# EAGLE board schema_carte_mere (EAGLE 6.4)
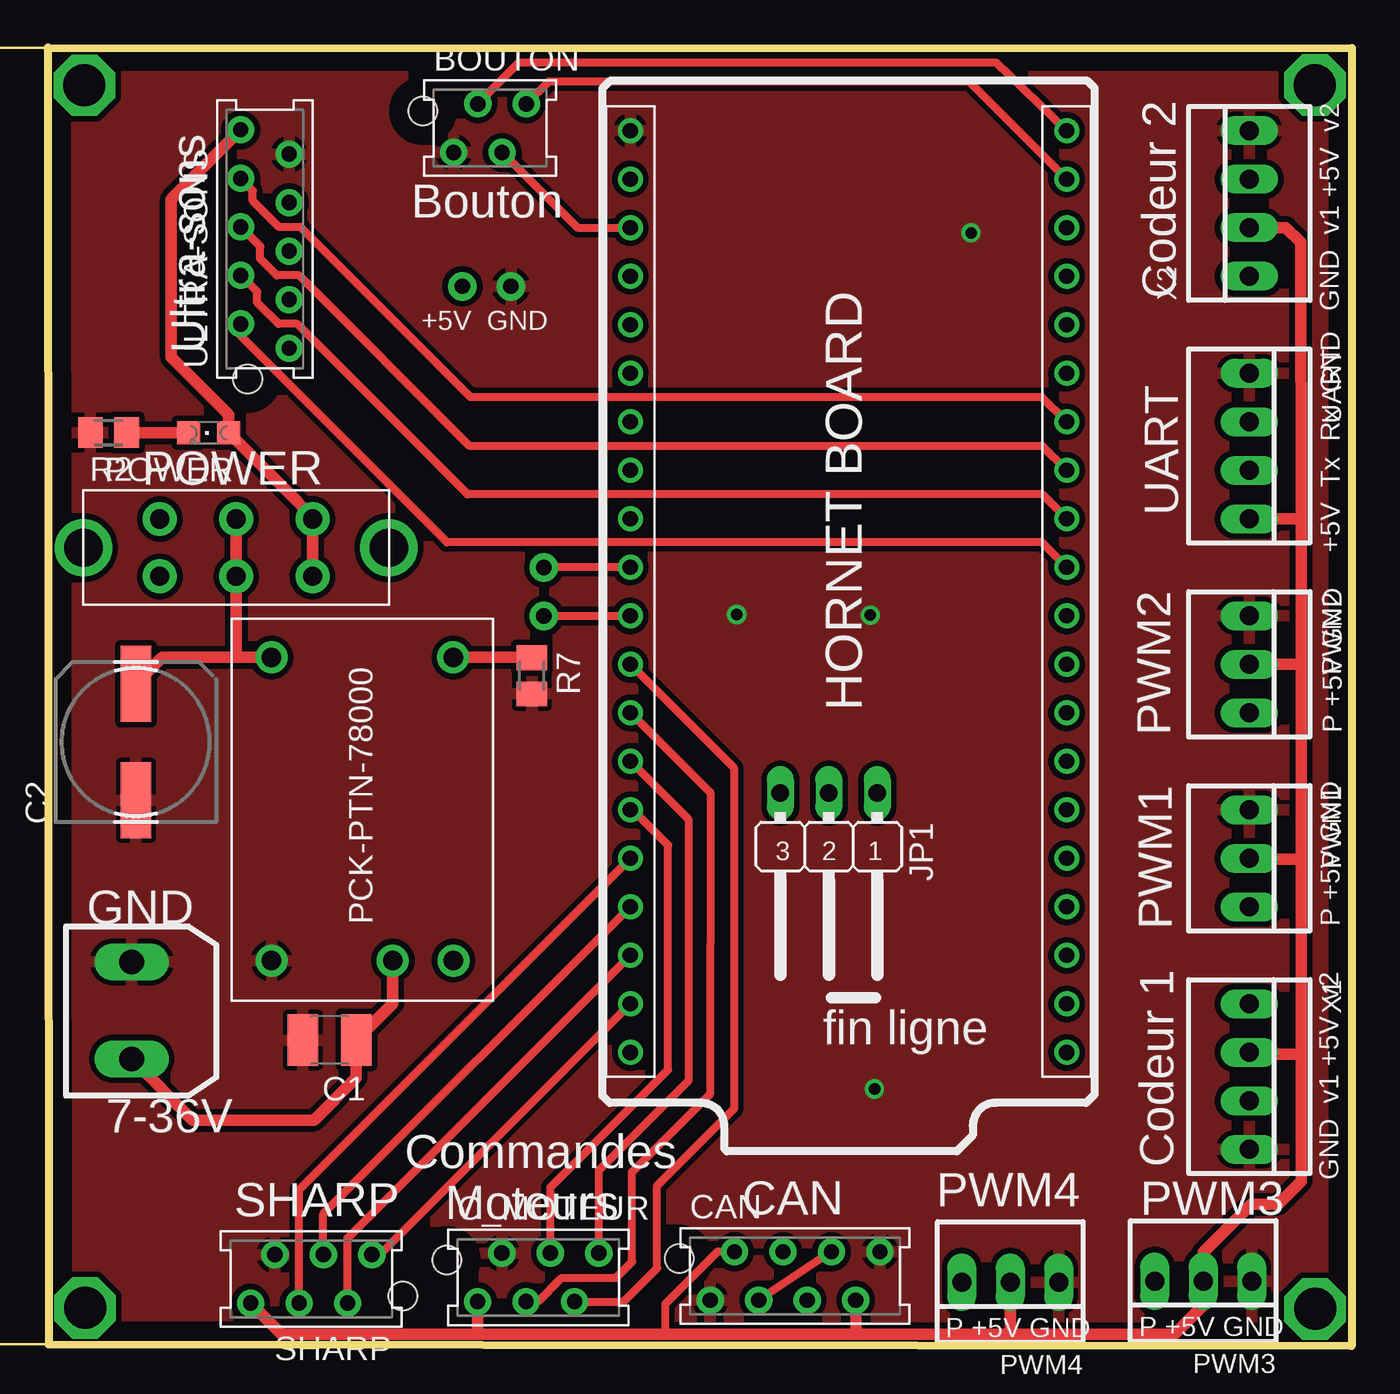
[diagram p0: board, top side]
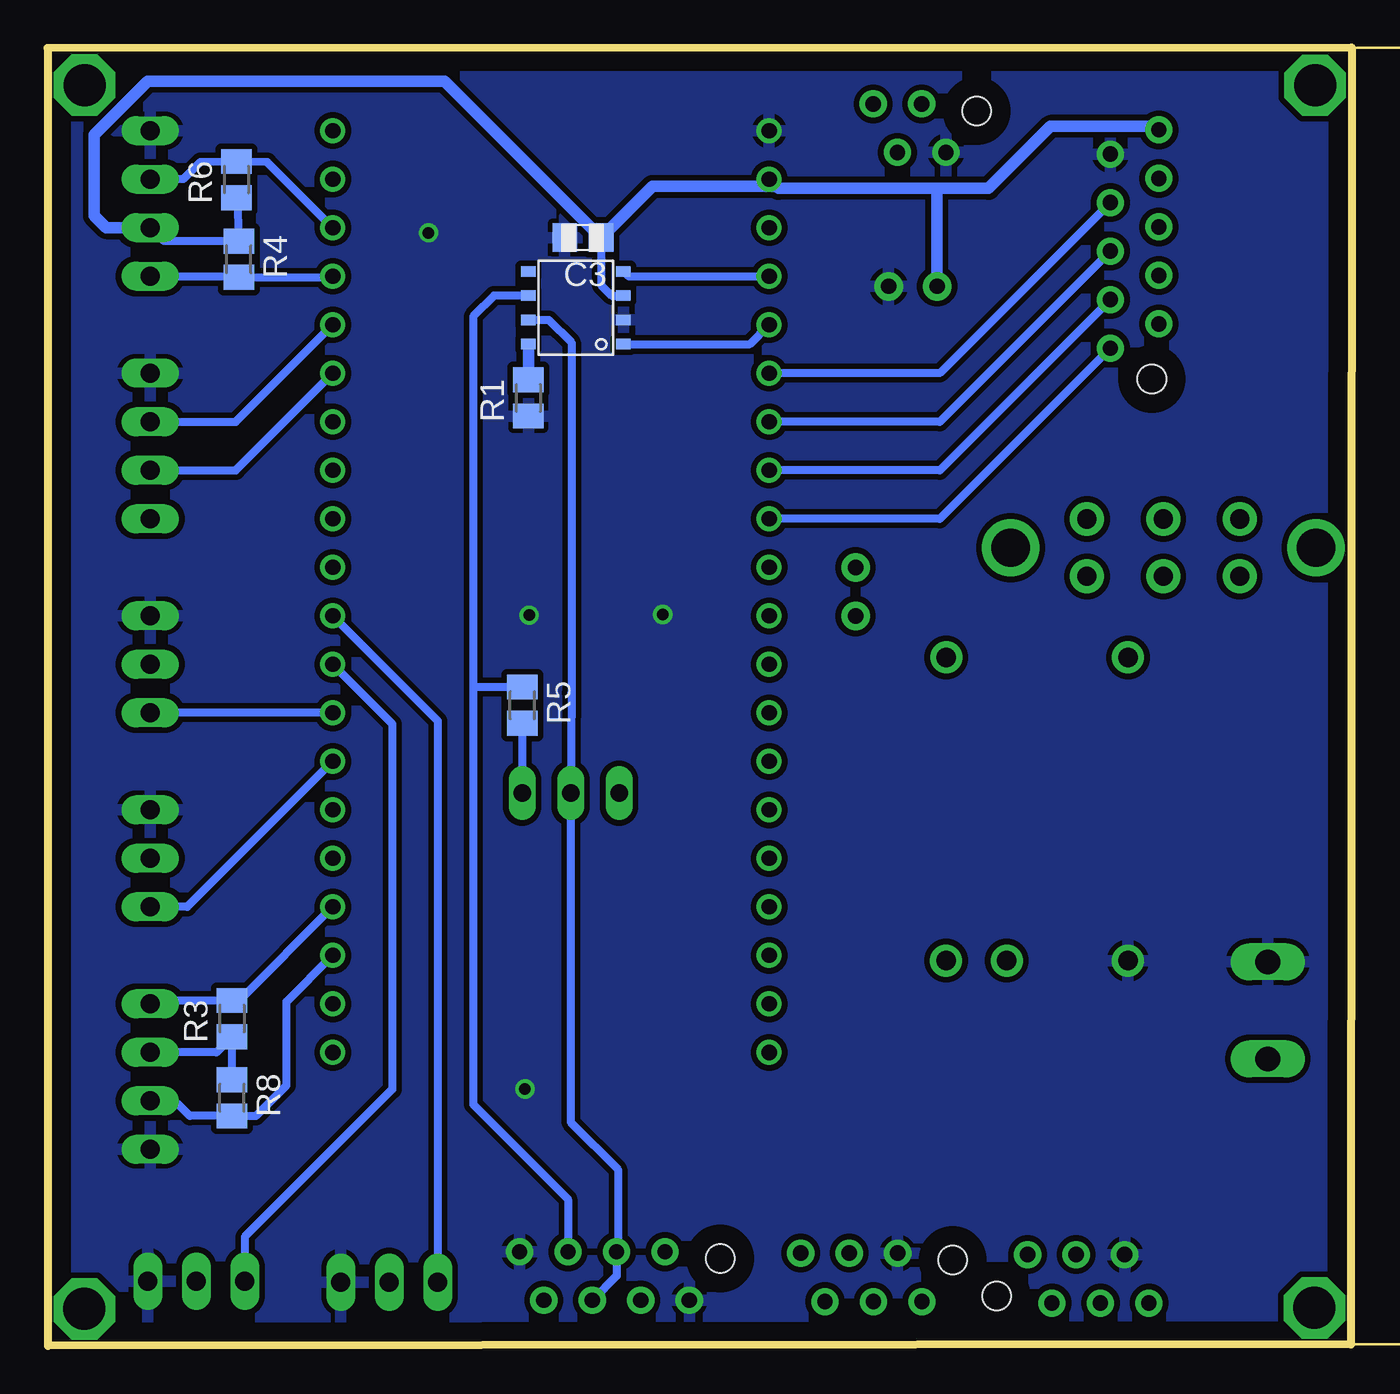
[diagram p1: board, bottom side, seen from below]

Size 68.31 x 67.97 mm. Coordinates in mm from the lower left corner, seen from the top.
Outline: 0.01,67.97 68.31,67.95 68.3,0
Outline: 0,67.97 0.04,0.07 68.3,0
Outline: 68.3,0 68.3,0
Copper layers (1*16): Top 0.035mm / dielectric 1.5mm / Bottom 0.035mm
Design rules "default": minimum track width 10mil, minimum drill 24mil, track to track 8mil, track to pad 8mil, pad to pad 8mil, via to via 8mil, smd to smd 8mil, copper to edge 40mil, drill to drill 8mil, minimum pad ring 10mil, minimum via ring 8mil, stop-mask expansion 4mil, vias tented up to drill 0mil, thermal gap 10mil
Milling: area -15,66.5 to -14.4,68; area -15,0.1 to -14.4,1.6; area -14.3,31.2 to -12.5,36.8; 6 lines

## Footprints (pad centres in the part's own frame; a part is rotated, then mirrored left to right if it is on the bottom)
PM5.08_2 = drill 1.3 long: P$1 0,0; P$2 -5.08,0
AMP-215079-4 = drill 0.8 pad 1.422: 1 0,0; 2 1.27,2.54; 3 2.54,0; 4 3.81,2.54 | hole 1.5: -1.62,2.175
C1210 = smd 1.6 x 2.7: 1 -1.4,0; 2 1.4,0
153CLV-0807 = smd 4 x 1.6: + 3.05,0; - -3.05,0
C0805 = smd 1.3 x 1.5: 1 -0.95,0; 2 0.95,0
AMP-215079-6 = drill 0.8 pad 1.422: 1 0,0; 2 1.27,2.54; 3 2.54,0; 4 3.81,2.54; 5 5.08,0; 6 6.35,2.54 | hole 1.5: -1.62,2.175
AMP-215079-8 = drill 0.8 pad 1.422: 1 0,-1.27; 2 1.27,1.27; 3 2.54,-1.27; 4 3.81,1.27; 5 5.08,-1.27; 6 6.35,1.27; 7 7.62,-1.27; 8 8.89,1.27 | hole 1.5: -1.62,0.905
JP2W = drill 0.914 long: 1 -2.54,-1.27; 2 0,-1.27; 3 2.54,-1.27
2_PIN = drill 0.8 pad 1.5: P$1 0,0; P$2 2.54,0
CHIPLED_0805 = smd 1.2 x 1.2: A 0,-1.05; C 0,1.05
22-23-2031 = drill 1 long: 1 -2.54,0; 2 0,0; 3 2.54,0
M0805 = smd 1.3 x 1.6: 1 -0.95,0; 2 0.95,0
HORNET_EXT_20 = drill 0.8: P$1 0,0; P$2 0,-2.54; P$3 0,-5.08; P$4 0,-7.62; P$5 0,-10.16; P$6 0,-12.7; P$7 0,-15.24; P$8 0,-17.78; P$9 0,-20.32; P$10 0,-22.86; P$11 0,-25.4; P$12 0,-27.94; P$13 0,-30.48; P$14 0,-33.02; P$15 0,-35.56; P$16 0,-38.1; P$17 0,-40.64; P$18 0,-43.18; P$19 0,-45.72; P$20 0,-48.26; P$21 22.86,-48.26; P$22 22.86,-45.72; P$23 22.86,-43.18; P$24 22.86,-40.64; P$25 22.86,-38.1; P$26 22.86,-35.56; P$27 22.86,-33.02; P$28 22.86,-30.48; P$29 22.86,-27.94; P$30 22.86,-25.4; P$31 22.86,-22.86; P$32 22.86,-20.32; P$33 22.86,-17.78; P$34 22.86,-15.24; P$35 22.86,-12.7; P$36 22.86,-10.16; P$37 22.86,-7.62; P$38 22.86,-5.08; P$39 22.86,-2.54; P$40 22.86,0
SOIC_8 = smd 0.559 x 0.762: P1 0,-4.966; P2 1.27,-4.966; P3 2.54,-4.966; P4 3.81,-4.966; P5 3.81,0; P6 2.54,0; P7 1.27,0; P8 0,0
SWITCH = drill 1 pad 1.778: 1 0,8; 2 0,4; 3 0,0; 4 3,8; 5 3,4; 6 3,0 | drill 2: GND 1.5,-4; GND2 1.5,12
PCK-PTN-78000WAH = drill 1.02 pad 1.676: 1 0,0; 2 0,-6.35; 3 0,-9.53; 4 15.88,-9.52; 5 15.88,0
22-23-2041 = drill 1 long: 1 -3.81,0; 2 -1.27,0; 3 1.27,0; 4 3.81,0
AMP-215079-10 = drill 0.8 pad 1.422: 1 0,-1.27; 2 1.27,1.27; 3 2.54,-1.27; 4 3.81,1.27; 5 5.08,-1.27; 6 6.35,1.27; 7 7.62,-1.27; 8 8.89,1.27; 9 10.16,-1.27; 10 11.43,1.27 | hole 1.5: -1.62,0.905

## Placement (x,y rotation side)
ALIM  PM5.08_2  [PM5.08_2]  4.4,15.02 270 top
BOUTON  MMATCH-4-  [AMP-215079-4]  21.26,62.49 0 top
C1  2.2u  [C1210]  14.76,16.01 180 top
C2  100uF  [153CLV-0807]  4.62,31.61 90 top
C3  100nF  [C0805]  40.27,58.02 180 bottom
C_MOTEUR  MMATCH-6-  [AMP-215079-6]  22.52,2.31 0 top
CAN  [AMP-215079-8]  34.7,3.66 0 top
JP1  [JP2W]  40.92,27.67 180 top
PIN_ALIM  2_PIN  [2_PIN]  21.72,55.48 0 top
POWER  [CHIPLED_0805]  8.44,47.8 90 top
PWM1  22-23-2031  [22-23-2031]  62.94,25.52 270 top
PWM2  22-23-2031  [22-23-2031]  62.94,35.69 270 top
PWM3  22-23-2031  [22-23-2031]  60.53,3.38 180 top
PWM4  22-23-2031  [22-23-2031]  50.42,3.33 180 top
R1  21k  [M0805]  43.13,49.63 90 bottom
R2  1k  [M0805]  3.19,47.82 180 top
R3  2.7k  [M0805]  58.65,17.13 90 bottom
R4  2.7k  [M0805]  58.3,56.89 270 bottom
R5  120  [M0805]  43.45,33.54 270 bottom
R6  2.7k  [M0805]  58.42,61.06 90 bottom
R7  21k  [M0805]  25.36,35.08 270 top
R8  2.7k  [M0805]  58.66,12.99 270 bottom
SHARP  MMATCH-6-  [AMP-215079-6]  16.98,4.77 180 top
U$1  HORNET_BOARD  [HORNET_EXT_20]  30.52,63.62 0 top
U$2  MCP2551  [SOIC_8]  43.12,52.45 90 bottom
U$3  2_PIN  [2_PIN]  25.99,38.21 90 top
U$6  SWITCH  [SWITCH]  13.87,40.29 90 top
U$18  PTN-78000WAH  [PCK-PTN-78000WAH]  11.72,20.16 90 top
UART  22-23-2041  [22-23-2041]  62.94,47.12 270 top
ULTRA-SONS  [AMP-215079-10]  11.38,52.24 90 top
X1  22-23-2041  [22-23-2041]  62.94,14.09 270 top
X2  22-23-2041  [22-23-2041]  62.94,59.81 90 top

## Library data of the parts
ALIM = con_Weidmueller
BOUTON C_MOTEUR CAN SHARP ULTRA-SONS = jt-con-micromatch
C1-C3 R1-R8 = rcl
JP1 = jumper
PIN_ALIM U$1 U$3 = con-HORNET
POWER = led
PWM1-PWM4 = con-molex; MF: MOLEX; MPN: 22-23-2031; OC_FARNELL: 1462950; OC_NEWARK: 30C0862
U$2 = microchip
U$6 = switch
U$18 = Ares_Library_Alimentation
UART X1 X2 = con-molex; MF: MOLEX; MPN: 22-23-2041; OC_FARNELL: 1462920; OC_NEWARK: 38C0355

## Nets
+3V3: BOUTON.3 U$1.P$3
+5V: C3.1 C_MOTEUR.1 CAN.2 CAN.7 PIN_ALIM.P$1 POWER.A PWM1.2 PWM2.2 PWM3.2 PWM4.2 R3.1 R4.1 R6.1 R8.1 SHARP.6 U$1.P$2 U$2.P3 U$6.3 U$6.6 UART.4 ULTRA-SONS.10 X1.2 X2.2
CANH: CAN.4 CAN.5 JP1.2 U$2.P7
CANL: CAN.3 CAN.6 R5.1 U$2.P6
CANRX: U$1.P$4 U$2.P4
CANTX: U$1.P$5 U$2.P1
CODEUR1_V1: R8.2 U$1.P$23 X1.3
CODEUR1_V2: R3.2 U$1.P$24 X1.1
CODEUR2_V1: R4.2 U$1.P$37 X2.1
CODEUR2_V2: R6.2 U$1.P$38 X2.3
COULEUR: BOUTON.4 U$1.P$39
DIR1: C_MOTEUR.3 U$1.P$13
DIR2: C_MOTEUR.5 U$1.P$12
E1: U$1.P$6 ULTRA-SONS.7
E2: U$1.P$7 ULTRA-SONS.5
E3: U$1.P$8 ULTRA-SONS.3
E4: U$1.P$9 ULTRA-SONS.1
GND: ALIM.P$2 BOUTON.1 C1.2 C2.- C3.2 C_MOTEUR.2 CAN.1 CAN.8 PIN_ALIM.P$2 PWM1.1 PWM2.1 PWM3.1 PWM4.1 R1.1 R2.2 R7.2 SHARP.5 U$1.P$1 U$2.P2 U$18.1 UART.1 ULTRA-SONS.9 X1.4 X2.4
N$1: ALIM.P$1 C1.1 U$18.2
N$2: POWER.C R2.1
N$3: R1.2 U$2.P8
N$4: C2.+ U$6.2 U$6.5 U$18.5
N$5: U$1.P$11 U$3.P$1
N$7: R7.1 U$18.4
N$9: JP1.1 R5.2
N$12: U$1.P$10 U$3.P$2
PWM1: PWM1.3 U$1.P$27
PWM2: PWM2.3 U$1.P$28
PWM3: PWM3.3 U$1.P$29
PWM4: PWM4.3 U$1.P$30
PWM_MOT1: C_MOTEUR.4 U$1.P$15
PWM_MOT2: C_MOTEUR.6 U$1.P$14
SHARP1: SHARP.4 U$1.P$16
SHARP2: SHARP.3 U$1.P$17
SHARP3: SHARP.2 U$1.P$18
SHARP4: SHARP.1 U$1.P$19
T1: U$1.P$34 ULTRA-SONS.8
T2: U$1.P$33 ULTRA-SONS.6
T3: U$1.P$32 ULTRA-SONS.4
T4: U$1.P$31 ULTRA-SONS.2
TIRETTE: BOUTON.2 U$1.P$40
UART_RX: U$1.P$36 UART.2
UART_TX: U$1.P$35 UART.3

## Tracks (layer width: path | path; a pad name or v marks a point on that pad's centre or on a via)
+3V3
  Top 0.406: BOUTON.3 27.74,58.55 U$1.P$3
+5V
  Top 0.406: CAN.2 35.08,4.93 32.33,2.18 32.33,0.78 32.17,0.62
  Top 0.61: 65.66,15.27 65.66,8.62 64.45,7.41 63.05,7.41 60.53,4.89 PWM3.2 60.52,2.12 59.02,0.62 50.28,0.62 | 65.66,15.27 65.66,25.47 | 65.66,25.47 65.66,35.63 | 65.66,35.63 65.66,43.09 | 65.66,43.09 65.62,57.77 64.85,58.55 X2.2 | PWM1.2 63,25.47 65.66,25.47 | X1.2 63.03,15.27 65.66,15.27 | CAN.7 42.33,0.62 | 42.33,0.62 50.28,0.62 | PWM4.2 50.42,0.75 50.28,0.62 | PWM2.2 65.6,35.69 65.66,35.63 | UART.4 65.44,43.3 65.66,43.09 | 22.51,0.62 12.24,0.62 SHARP.6 | 22.51,0.62 32.17,0.62 42.33,0.62 | U$6.3 U$6.6 13.1,44.19 POWER.A 9.49,48.75 6.47,51.77 6.47,60.03 ULTRA-SONS.10 | C_MOTEUR.1 22.52,0.62 22.51,0.62
  Bottom 0.406: R6.1 58.34,60.19 R4.1 62.21,57.85 X2.2 | X1.2 59.47,15.36 R3.1 R8.1 | C3.1 39.32,55.54 38.77,54.99 U$2.P3
  Bottom 0.61: ULTRA-SONS.10 10.29,63.85 15.78,63.85 19.03,60.6 21.59,60.6 | 21.59,60.6 30.03,60.6 30.14,60.71 | 30.14,60.71 U$1.P$2 | 30.14,60.71 36.64,60.71 C3.1 47.52,66.22 63.07,66.22 65.87,63.42 65.87,59.16 65.25,58.55 X2.2 | PIN_ALIM.P$1 21.72,60.47 21.59,60.6
CANH
  Bottom 0.406: U$2.P7 42.07,53.72 40.88,52.53 40.88,34.18 JP1.2 40.92,11.71 38.44,9.24 38.44,4.99 CAN.4 38.51,3.66 CAN.5
CANL
  Top 0.406: CAN.6 CAN.3
  Bottom 0.406: U$2.P6 44.93,54.99 46.02,53.9 46.02,34.42 | 46.02,34.42 46.02,12.64 41.06,7.68 CAN.6 | R5.1 45.95,34.49 46.02,34.42
CANRX
  Bottom 0.406: U$2.P4 37.9,56.01 U$1.P$4
CANTX
  Bottom 0.406: U$2.P1 31.53,52.45 U$1.P$5
CODEUR1_V1
  Bottom 0.406: X1.3 62.81,12.7 61.53,12.7 60.87,12.04 R8.2 57.39,12.04 55.8,13.63 55.8,18.03 U$1.P$23
CODEUR1_V2
  Bottom 0.406: X1.1 62.77,18.08 R3.2 58.28,18.08 U$1.P$24
CODEUR2_V1
  Bottom 0.406: X2.1 57.86,56.01 R4.2 53.47,55.94 U$1.P$37
CODEUR2_V2
  Bottom 0.406: U$1.P$38 56.81,61.98 R6.2 60.31,61.98 61.2,61.09 X2.3
COULEUR
  Top 0.406: BOUTON.4 26.25,66.21 48.25,66.21 U$1.P$39
DIR1
  Top 0.406: C_MOTEUR.3 25.68,2.32 26.92,3.56 29.77,3.56 30.62,4.4 30.6,9.09 34.71,13.21 34.74,28.92 34.74,28.93 U$1.P$13
DIR2
  Top 0.406: C_MOTEUR.5 30.17,2.32 31.93,4.07 31.93,8.38 35.97,12.43 35.97,30.23 U$1.P$12
E1
  Bottom 0.406: ULTRA-SONS.7 21.58,50.92 U$1.P$6
E2
  Bottom 0.406: ULTRA-SONS.5 21.58,48.38 U$1.P$7
E3
  Bottom 0.406: ULTRA-SONS.3 21.58,45.84 U$1.P$8
E4
  Bottom 0.406: ULTRA-SONS.1 21.58,43.3 U$1.P$9
GND  (via drill 0.6)
  other vias: 43.31,13.45 43.09,38.26 36.09,38.3 48.36,58.27
  pour Bottom (isolate 0.3): 0.07,67.92 68.32,67.92 68.32,0.03 0.07,0.03
  pour Top (isolate 0.3): 0.04,67.89 68.32,67.89 68.32,0.04 0.04,0.04
N$1
  Top 0.61: U$18.2 18.08,17.92 C1.1 16.15,14.03 13.95,11.82 7.6,11.82 ALIM.P$1
N$2
  Top 0.61: R2.1 7.37,47.82 POWER.C
N$3
  Bottom 0.61: U$2.P8 R1.2
N$4
  Top 0.61: C2.+ 6,36.04 9.88,36.04 | 9.88,36.04 U$18.5 | 9.88,36.04 9.88,40.26 U$6.2 U$6.5
N$5
  Top 0.406: U$3.P$1 30.51,38.21 U$1.P$11
N$6  (via drill 2.2)
  other vias: 66.38,1.93
N$7
  Top 0.61: U$18.4 25.35,36.04 R7.1
N$8  (via drill 2.2)
  other vias: 66.38,66.01
N$9
  Bottom 0.406: R5.2 JP1.1
N$10  (via drill 2.2)
  other vias: 1.91,66
N$11  (via drill 2.2)
  other vias: 1.96,1.99
N$12
  Top 0.406: U$1.P$10 U$3.P$2
PWM1
  Bottom 0.406: U$1.P$27 61,22.98 PWM1.3
PWM2
  Bottom 0.406: U$1.P$28 PWM2.3
PWM3
  Bottom 0.406: U$1.P$29 50.26,32.56 50.26,13.43 57.99,5.7 PWM3.3
PWM4
  Bottom 0.406: U$1.P$30 47.88,32.73 PWM4.3
PWM_MOT1
  Top 0.406: C_MOTEUR.4 26.33,8.3 32.49,14.47 32.49,26.21 30.64,28.06 U$1.P$15
PWM_MOT2
  Top 0.406: C_MOTEUR.6 28.87,9.2 33.58,13.91 33.58,27.54 U$1.P$14
SHARP1
  Top 0.406: SHARP.4 13.17,8.17 U$1.P$16
SHARP2
  Top 0.406: SHARP.3 14.44,6.9 U$1.P$17
SHARP3
  Top 0.406: SHARP.2 15.71,5.63 U$1.P$18
SHARP4
  Top 0.406: SHARP.1 17.39,4.77 U$1.P$19
T1
  Top 0.406: U$1.P$34 52.08,49.68 22.15,49.68 13.25,58.57 12.13,58.57 10.74,59.95 10.74,60.49 ULTRA-SONS.8
T2
  Top 0.406: U$1.P$33 52.11,47.11 22.11,47.11 13.17,56.05 12,56.05 11.13,56.92 11.13,57.57 ULTRA-SONS.6
T3
  Top 0.406: U$1.P$32 52.09,44.59 21.98,44.59 13.06,53.51 12.09,53.51 10.98,54.62 10.98,55.18 ULTRA-SONS.4
T4
  Top 0.406: U$1.P$31 52.07,42.07 20.91,42.07 10.11,52.88 ULTRA-SONS.2
TIRETTE
  Top 0.406: U$1.P$40 49.7,67.18 24.67,67.18 BOUTON.2
UART_RX
  Bottom 0.406: UART.2 58.46,48.38 U$1.P$36
UART_TX
  Bottom 0.406: UART.3 58.46,45.84 U$1.P$35

## Text on the board
tPlace: Ultra-sons | Bouton | Codeur 2 | GND v1 +5V v2 | +5V GND | POWER | UART | +5V Tx Rx GND | HORNET BOARD | PWM2 | P +5V GND | GND | PWM1 | P +5V GND | fin ligne | 7-36V | Codeur 1 | GND v1 +5V v2 | SHARP | CAN | PWM4 | PWM3 | Commandes / Moteurs | P +5V GND | P +5V GND